# Altium PCB DTM17E0000.PcbDoc
Units mm, origin at the board's own origin, x right, y up, seen from the top; angles counter-clockwise.
Board outline 50.8 x 22.35 mm, 2 copper layers (Top Layer, Bottom Layer); 43 components, 29 nets, 157 pads, 84 vias.
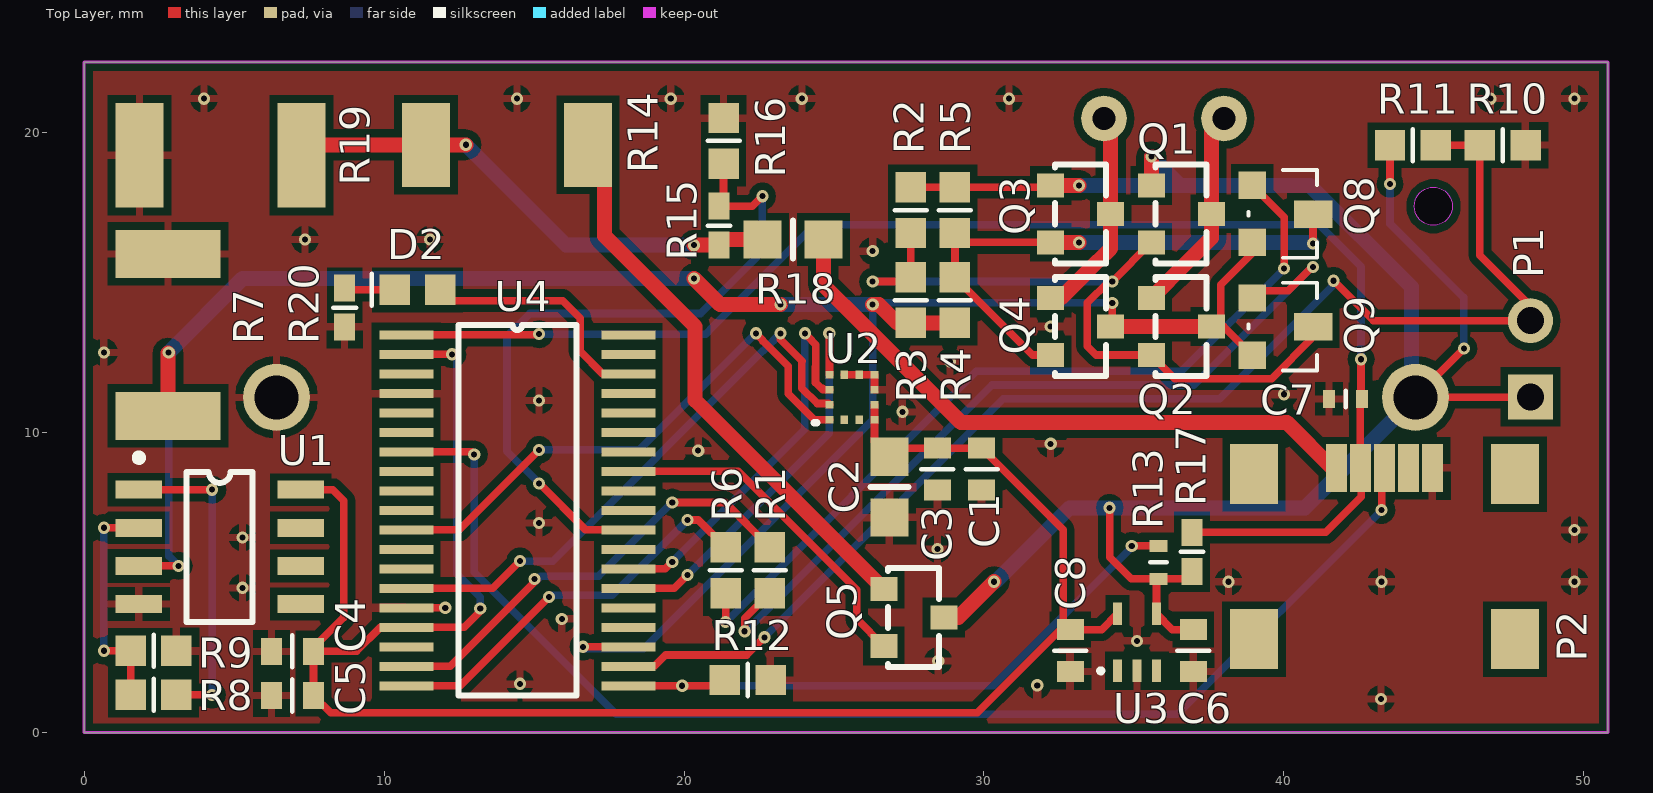
[diagram p0: Top Layer view]
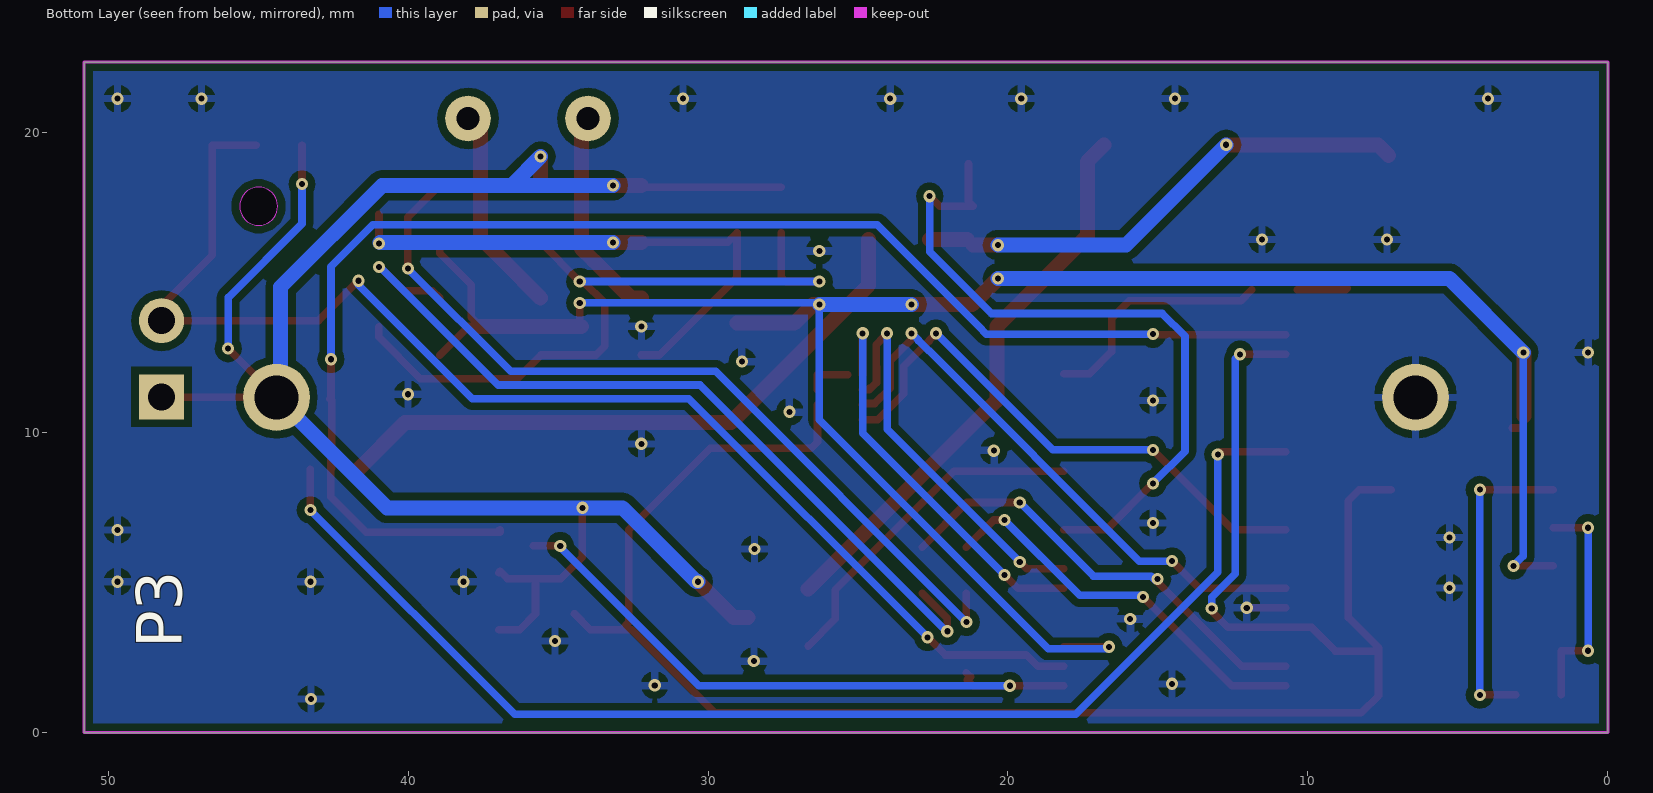
[diagram p1: Bottom Layer view, seen from below]

## Layer stack, top to bottom
Top Solder: solder mask 0.0102, Solder Resist, Dk 3.5
Top Layer: signal copper 0.0356
Dielectric 1: dielectric 0.32, FR-4, Dk 4.8
Bottom Layer: signal copper 0.0356
Bottom Solder: solder mask 0.0102, Solder Resist, Dk 3.5

## Board outline
0,0 50.8,0 50.8,22.352 0,22.352

## Design rules (kind name [scope] priority, off if disabled: settings)
Clearance [All] p1: gap=0.254 except(0.1: SMDPad-SMDPad; 0.2: Track-Track Track-SMDPad)
PolygonConnect [All] p1: connectstyle=Relief reliefconductorwidth=0.254 reliefentries=4 polygonreliefangle="90 Angle" airgapwidth=0.254
RoutingVias [All] p1: holewidth=0.711 width=1.27 viastyle="Through Hole" minholewidth=0.711 minwidth=1.27 maxholewidth=0.711 maxwidth=1.27
SolderMaskExpansion [All] p1: expansion=0.102
Width [All] p1: maxlimit=0.5 minlimit=0.254 preferedwidth=0.254 minimp=50.000000 maximp=50.000000 favimp=50.000000
30 further rules are at their usual default settings.

## Components (designator, comment, footprint, x,y, rotation, side; value= is the part's Value field where it differs from the comment)
C1 "0.1uF" "0603 Small" 29.92,8.781 r90 top (schematic designator C8)
C2 "10uF" "0805 Small" 26.846,8.18 r90 top (schematic designator C?)
C3 "0.1uF" "0603 Small" 28.447,8.781 r270 top (schematic designator C8)
C4 "0.1uF" "0603 Small" 6.946,2.708 r180 top (schematic designator C8)
C5 "0.1uF" "0603 Small" 6.946,1.235 r180 top (schematic designator C8)
C6 "0.1uF" "0603 Small" 36.978,2.732 r270 top (schematic designator C8)
C7 "1nF" "0402 Small" 42.054,11.125 r0 top (schematic designator C?)
C8 "0.1uF" "0603 Small" 32.876,2.732 r90 top
D2 "RED" "0603 LED" 11.114,14.757 r180 top
P1 "Header 2H" "Header 2" 48.218,11.191 r180 top
P2 "Mini USB" "Mini USB" 39,3.114 r90 top
P3 "BH123A" BH123A 6.415,11.176 r0 bottom
Q1 "MOSFET-P" SOT23 36.581,17.292 r270 top (schematic designator Q?)
Q2 "MOSFET-N" SOT23 36.581,13.536 r270 top (schematic designator Q?)
Q3 "MOSFET-P" SOT23 33.223,17.292 r270 top
Q4 "MOSFET-N" SOT23 33.223,13.536 r270 top
Q5 "MOSFET-N" SOT23 27.661,3.835 r270 top
Q8 "MMST2222A" SOT-23N 39.961,17.292 r270 top
Q9 "MMST2222A" SOT-23N 39.961,13.536 r270 top
R1 "1K" "0603 resistor" 22.86,5.41 r90 top (schematic designator R?)
R2 "1M" "0603 resistor" 27.559,17.417 r270 top (schematic designator R?)
R3 "10M" "0603 resistor" 27.559,14.419 r90 top (schematic designator R?)
R4 "10M" "0603 resistor" 29.032,14.419 r90 top (schematic designator R14)
R5 "1M" "0603 resistor" 29.032,17.417 r270 top (schematic designator R16)
R6 "1K" "0603 resistor" 21.387,5.41 r90 top (schematic designator R18)
R7 "0.1" "2512 RESISTOR" 2.796,13.259 r270 top (schematic designator R13)
R8 "100KΩ" "0603 Resistor" 2.316,2.728 r180 top (schematic designator R5)
R9 "1MΩ" "0603 Resistor" 2.316,1.255 r180 top
R10 "1MΩ" "0603 Resistor" 47.295,19.583 r180 top (schematic designator R2)
R11 "1MΩ" "0603 Resistor" 44.297,19.583 r180 top (schematic designator R2)
R12 "1MΩ" "0603 Resistor" 22.123,1.753 r180 top (schematic designator R2)
R13 "2.7M" "0402 Small" 35.821,5.674 r90 top
R14 "2.7Ω" "2010 resistor" 14.097,19.596 r180 top (schematic designator R13)
R15 "330K" "0402 Resistor" 21.165,16.899 r90 top (schematic designator R?)
R16 "1M" "0603 resistor" 21.318,19.726 r90 top
R17 "47K" "0402 Resistor" 36.934,6.024 r90 top (schematic designator R?)
R18 "2.4" "0805 Small" 23.629,16.434 r0 top (schematic designator R13)
R19 "13Ω" "2512 RESISTOR" 4.546,19.246 r0 top (schematic designator R14)
R20 "1KΩ" "0402 Resistor" 8.687,14.165 r90 top
U1 "TS27L2" SOIC-8 4.521,6.192 r0 top
U2 "LIS2HH12" LIS2HH12 26.349,10.426 r180 top
U3 "TPS71533DCKR" SC70_5 34.451,2.057 r90 top
U4 "MSP430F2272IDA" MSP430F2272IDA 10.744,13.259 r0 top (schematic designator U?)

## Footprints (in the part's own frame and the unit in brackets; to place one, negate y for a bottom-side part, rotate by r counter-clockwise, add the part's x,y. Pads: shape width x height; smd on the part's side, far side on the other; paste and mask are expansions set on the pad)
"0402 Resistor" [mm]
  rect 0.9x0.7 smd: 1(-0.65,0) 2(0.65,0)
  silkscreen extent 0,-0.38 0,0.38, body extent -0.52,-0.27 0.53,0.28, height 0.25
"0402 Small" [mm]
  rect 0.4x0.6 smd: 1(-0.55,0) 2(0.55,0)
  silkscreen extent 0,-0.27 0,0.28, body extent -0.52,-0.27 0.53,0.28, height 0.25
"0603 LED" [mil]
  rect 40x40 smd: 1(-30,0) 2(30,0)
  silkscreen extent 60,-21 60,21, body extent -31,-16 32,16, height 37
"0603 resistor" [mil]
  rect 40x40 smd: 1(-30,0) 2(30,0)
  silkscreen extent 0,-21 0,21, body extent -30,-15 31,15, height 20
"0603 Resistor" [mil] "Axial Device, Thru-Hole; 2 Leads; 0.3 in Pin Spacing"
  rect 40x40 smd: 1(-30,0) 2(30,0)
  silkscreen extent 0,-21 0,21, body extent -30,-15 31,15, height 20
"0603 Small" [mm]
  rect 0.7x0.9 smd: 1(-0.7,0) 2(0.7,0)
  silkscreen extent 0,-0.53 0,0.53, body extent -0.77,-0.38 0.77,0.38, height 0.51
"0805 Small" [mil]
  rect 50x50 smd: 1(-40,0) 2(40,0)
  silkscreen extent 0,-25 0,25, body extent -40,-25 40,25, height 25
"2010 resistor" [mm]
  rect 1.6x2.8 smd: 1(-2.7,0) 2(2.7,0)
"2512 RESISTOR" [mm]
  rect 1.6x3.5 smd: 1(-2.7,0) 2(2.7,0)
BH123A [mm] "CR123A Battery Holder"
  round 2.232 hole 1.47: 1(37.97,0) 2(0,0)
  Keep-Out Layer board cut-out: 37.93,-6.37 37.978,-6.613 38.116,-6.819 38.322,-6.957 38.565,-7.005 38.565,-7.005 38.808,-6.957 39.014,-6.819 39.152,-6.613 39.2,-6.37 39.2,-6.37 39.152,-6.127 39.014,-5.921 38.808,-5.783 38.565,-5.735 38.565,-5.735 38.322,-5.783 38.116,-5.921 37.978,-6.127 37.93,-6.37
  body extent -2.64,-9.02 40.61,9.02, height 12.09
"Header 2" [mm] "Header 2"
  rect 1.5x1.5 hole 0.9: 1(0,0)
  round 1.5 hole 0.9: 2(0,-2.54)
LIS2HH12 [mm]
  rect 0.275x0.25 smd: 1(1.5,0) 2(1.5,-0.5) 3(1.5,-1) 4(1.5,-1.5) 7(0,-1.5) 8(0,-1) 9(0,-0.5) 10(0,0)
  rect 0.25x0.275 smd: 5(1,-1.5) 6(0.5,-1.5) 11(0.5,0) 12(1,0)
  silkscreen extent 1.93,0.1 2.01,0.1
"Mini USB" [mm]
  rect 1.6x0.7 smd: 1(5.7,-2.75) 2(5.7,-3.55) 3(5.7,-4.35) 4(5.7,-5.15) 5(5.7,-5.95)
  rect 2x1.6 smd: 6(5.5,-8.7) 7(0,-8.7) 8(0,0) 9(5.5,0)
  body extent -3.13,-8.83 5.63,0.13, height 3.88
MSP430F2272IDA [mm]
  rect 1.8x0.3 smd: 1(0,0) 2(0,-0.65) 3(0,-1.3) 4(0,-1.95) 5(0,-2.6) 6(0,-3.25) 7(0,-3.9) 8(0,-4.55) 9(0,-5.2) 10(0,-5.85) 11(0,-6.5) 12(0,-7.15) 13(0,-7.8) 14(0,-8.45) 15(0,-9.1) 16(0,-9.75) 17(0,-10.4) 18(0,-11.05) 19(0,-11.7) 20(7.4,-11.7) 21(7.4,-11.05) 22(7.4,-10.4) 23(7.4,-9.75) 24(7.4,-9.1) 25(7.4,-8.45) 26(7.4,-7.8) 27(7.4,-7.15) 28(7.4,-6.5) 29(7.4,-5.85) 30(7.4,-5.2) 31(7.4,-4.55) 32(7.4,-3.9) 33(7.4,-3.25) 34(7.4,-2.6) 35(7.4,-1.95) 36(7.4,-1.3) 37(7.4,-0.65) 38(7.4,0)
  silkscreen extent 1.73,-12.03 5.67,0.33
SC70_5 [mm]
  rect 0.75x0.3 smd: 1(0,0) 2(0,-0.65) 3(0,-1.3) 4(1.9,-1.3) 5(1.9,0)
  silkscreen extent -0.08,0.48 0.08,0.63, body extent 0.3,-1.66 1.54,0.34, height 1.07
SOIC-8 [mm]
  rect 1.55x0.6 smd: 1(-2.7,1.905) 2(-2.7,0.635) 3(-2.7,-0.635) 4(-2.7,-1.905) 5(2.7,-1.905) 6(2.7,-0.635) 7(2.7,0.635) 8(2.7,1.905)
  silkscreen extent -2.81,-2.5 1.1,3.09, body extent -1.91,-2.54 1.91,2.54, height 1.52
SOT23 [mm] "TO, Flat Index; 3 In-Line, Axial Leads; Body Dia. 4.6mm; Lead Dia. 0.5 mm (max)"
  rect 0.8x0.9 smd: 1(-0.95,-1) 2(0.95,-1) 3(0,1)
  silkscreen extent -1.65,-0.86 1.65,0.84, body extent -1.45,-1.32 1.45,1.47, height 1.02
SOT-23N [mil]
  rect 36x36 smd: B(-37.5,-40) E(37.5,-40)
  rect 36x50 smd: C(0.5,40)
  silkscreen extent -57,-45 58,45, body extent -57,-52 57,58, height 40

## Part data
C1 C3 C4 C5 C6 C8: library part CAP, "CAP CER 0.1UF 50V 10% X7R 0603"
C2: library part Cap, "CAP CER 10UF 6.3V X5R 0805"
C7: library part Cap, "CAP CER 1000PF 6.3V X5R 0402"
D2: library part LED2, "Standard LEDs - SMD Red 630nm 700mcd"
P1: "Header, 2-Pin, Right Angle"
P2: "CONN MINI USB RCPT RA TYPE B SMD"
P3: "CR123A Battery Holder    Features reverse polarity protection"
Q1 Q3: "MOSFET P-CH 20V 4.2A SOT23"
Q2 Q4 Q5: "MOSFET N-CH 20V 2.3A SOT23"
Q8 Q9: library part NPN1, "TRANSISTOR NPN GP 40V SOT23"
R1 R6: library part Resistor, "RES SMD 1K OHM 5% 1/10W 060"
R2 R5 R16: library part Resistor, "RES SMD 1M OHM 5% 1/10W 0603"
R3 R4: library part Resistor, "RES SMD 10M OHM 5% 1/10W 0603"
R7: library part Resistor, "RES SMD 0.1 OHM 5% 2W 2512"
R8: library part Res1, "RES SMD 100K OHM 5% 1/10W 0603"
R9 R10 R11 R12: library part Res1, "RES SMD 1M OHM 5% 1/10W 0603"
R13: library part Resistor, "RES SMD 2.7M OHM 5% 1/16W 0402"
R14: library part Resistor, "RES SMD 2.7 OHM 5% 3/4W 2010"
R15: library part Resistor, "RES SMD 330K OHM 5% 1/10W 0603"
R17: library part Resistor, "RES SMD 47K OHM 5% 1/16W 0402"
R18: library part Resistor, "RES SMD 2 OHM 5% 0.4W 0805"
R19: library part Resistor, "RES SMD 13 OHM 1% 2W 2512"
R20: library part Resistor, "RES 10K OHM .25W 5% 0603 SMD"
U1: "OP AMP - 2 CHANNEL"
U3: "IC REG LDO 3.3V 50MA SC70-5"
U4: library part CMP-0365-00081-2, "16 MHz Mixed Signal Microcontroller with 32 KB Flash, 1024 B SARM and 32 GPIOs, -40 to 85 degC, 38-pin SOP (DA), Green (RoHS & no Sb/Br)"

## Free pads (board coordinates)
  round 1.524 hole 0.762: 2(34,20.472) 2(38,20.472)

## Via types
v1: diameter 0.406, hole 0.203, Top Layer to Bottom Layer, tented both sides, 84 vias

## Nets (pads, with @x,y where several pads share a name; then routed paths per layer and width w, separated by ;. In a path a pad name is that pad's centre, name@x,y a point inside that pad or via, vN(x,y) a via of type N, cw(c..) or ccw(c..) an arc to the next point about the centre after c; other vN are vias at no path point)
GND: C1.1 C2.1 C3.2 C4.2 C5.2 C6.2 C7.1 C8.1 P2.5 P3.2 R7.1 R8.1 R10.1 R12.1 R16.2 R19.1 R20.1 U1.4 U2.5 U2.6 U2.7 U2.8 U3.2 U4.4 U4.15 | length 2.8
  Top Layer w0.254: U4.15 v1(12.04,4.159) ; U2.5 U2.6 U2.7 U2.8
  other v1: 43.231,1.118 31.775,1.575 14.529,1.626 28.473,2.388 35.103,3.048 15.926,3.785 5.283,4.826 38.152,5.029 43.256,5.029 49.682,5.029 28.447,6.121 5.283,6.502 49.682,6.756 15.17,6.985 20.472,9.398 32.223,9.627 27.28,10.693 15.17,11.074 40.005,11.278 28.863,12.37 0.66,12.675 32.223,13.536 26.289,16.053 7.366,16.434 11.532,16.434 4,21.133 14.427,21.133 19.558,21.133 23.927,21.133 30.836,21.133 46.888,21.133 49.682,21.133
NetC7_2: C7.2 P2.2 R17.2 U4.1 | length 48.5
  Top Layer w0.254: U4.1 15.145,13.259 v1(15.17,13.284) ; R17.2@36.934,6.751 R17.2 R17.2@36.936,6.677 ; R17.2@36.984,6.724 R17.2@36.936,6.677 ; P2.2@42.57,8.834 P2.2 42.55,11.071 C7.2 42.57,11.159 v1(42.57,12.446) ; P2.2@42.579,9.357 42.579,7.857 41.399,6.677 R17.2@36.936,6.677
  Bottom Layer w0.254: v1(15.17,13.284) 20.717,13.284 20.98,13.548 20.98,13.552 24.355,16.926 41.177,16.926 42.57,15.533 v1(42.57,12.446)
NetD2_1: D2.1 U4.36 | length 8.1
  Top Layer w0.254: D2.1 12.232,14.402 15.951,14.402 16.535,13.818 16.535,12.706 17.282,11.959 U4.36
NetD2_2: D2.2 R20.2 | length 1.7
  Top Layer w0.254: R20.2 8.745,14.757 D2.2
NetP1_2: P1.2 R10.2 R11.1 U4.21 | length 44
  Top Layer w0.254: U4.21 19.007,2.209 19.385,2.588 22.095,2.588 v1(22.682,3.175) ; v1(41.656,15.062) 42.987,13.731 P1.2 48.218,14.234 46.533,15.919 R10.2 R11.1
  Bottom Layer w0.254: v1(22.682,3.175) 30.639,11.132 37.852,11.132 41.656,14.935 v1(41.656,15.062)
NetP2_1: P2.1 R18.2 | length 21.1
  Top Layer w0.5: R18.2 24.645,14.918 25.996,13.568 29.23,10.334 40.099,10.334 P2.1@41.656,8.777
NetP2_3: P2.3 U4.7 | length 42.6
  Top Layer w0.254: U4.7 12.916,9.359 v1(13.005,9.271) ; v1(43.256,7.417) P2.3@43.256,8.777
  Bottom Layer w0.254: v1(13.005,9.271) 13.005,5.35 17.745,0.61 36.449,0.61 v1(43.256,7.417)
NetQ1_2: Q1.2 Q2.2 Q9.C R2.2 R3.2 | length 24.1
  Top Layer w0.254: v1(26.289,15.037) 27.415,15.037 R3.2 R2.2 ; Q1.2 v1(34.276,15.037) 34.161,15.037 33.446,14.322 33.446,12.883 33.744,12.586 Q2.2 36.367,11.799 39.586,11.799 40.977,13.19 Q9.C
  Bottom Layer w0.254: v1(26.289,15.037) v1(34.276,15.037)
NetQ1_3: pad.2@38,20.472 Q1.3 Q2.1 | length 7
  Top Layer w0.254: pad.2@37.581,20.053 pad.2@38,20.472
  Top Layer w0.5: Q2.1 36.779,15.684 37.581,16.486 Q1.3 pad.2@37.581,20.053
NetQ2_3: Q2.3 Q4.3 Q8.E Q9.E R3.1 R4.1 R7.2 U1.3 U4.22 | length 74.4
  Top Layer w0.254: U1.3 v1(3.15,5.557) ; v1@2.796,12.651 v1(2.819,12.675) ; R7.2@2.819,10.152 R7.2@3.183,10.152 ; v1@16.637,2.794 16.702,2.859 U4.22 ; Q4.3 34.276,13.588 v1(34.276,14.326) ; Q9.E 37.993,13.536 Q2.3 37.897,13.852 37.897,14.935 38.945,15.984 Q8.E
  Top Layer w0.5: R7.2 v1@2.796,12.651 ; v1(20.336,15.138) 21.2,14.275 v1(23.213,14.275) ; v1(26.289,14.275) 26.492,14.275 27.11,13.657 R3.1 R4.1 ; Q4.3 Q2.3
  Bottom Layer w0.254: v1(2.819,12.675) 2.819,5.887 v1(3.15,5.557) ; v1@16.637,2.794 18.653,2.794 26.289,10.43 v1(26.289,14.275) ; v1@26.238,14.326 v1(34.276,14.326)
  Bottom Layer w0.5: v1(2.819,12.675) 5.283,15.138 v1(20.336,15.138) ; v1(23.213,14.275) v1(26.289,14.275)
  other v1: 16.637,2.859
NetQ3_2: Q3.2 Q4.2 Q8.C R4.2 R5.2 | length 18.8
  Top Layer w0.254: Q4.2 31.628,12.586 R4.2 R5.2 29.345,16.342 Q3.2 ; v1(40.97,16.307) 40.97,17.272 Q8.C
  Top Layer w0.5: Q3.2 v1(33.172,16.342)
  Bottom Layer w0.254: v1@40.935,16.342 v1(40.97,16.307)
  Bottom Layer w0.5: v1(33.172,16.342) v1@40.935,16.342
NetQ3_3: pad.2@34,20.472 Q3.3 Q4.1 | length 7.1
  Top Layer w0.254: pad.2@34,20.472 pad.2@34.223,20.249
  Top Layer w0.5: Q4.1 32.57,14.486 33.405,15.32 33.405,15.33 33.819,15.744 33.829,15.744 34.223,16.138 Q3.3 pad.2@34.223,20.249
NetQ5_1: Q5.1 R14.1 | length 18.9
  Top Layer w0.5: R14.1 17.348,19.045 17.348,16.561 20.371,13.538 20.371,11.076 Q5.1
NetQ5_2: Q5.2 U4.31 | length 11.5
  Top Layer w0.254: U4.31 21.801,8.709 25.756,4.755 25.756,3.791 Q5.2
NetQ8_B: Q8.B R6.1 | length 27.7
  Top Layer w0.254: v1(21.387,3.683) R6.1 ; Q8.B 40.005,17.185 v1(40.005,15.469)
  Bottom Layer w0.254: v1(21.387,3.683) 29.743,12.04 36.576,12.04 v1(40.005,15.469)
NetQ9_B: Q9.B R1.1 | length 28
  Top Layer w0.254: v1(22.022,3.378) 22.022,3.805 22.86,4.643 R1.1 ; Q9.B 39.189,14.732 40.144,14.732 40.931,15.519 v1(40.97,15.519)
  Bottom Layer w0.254: v1@22.059,3.378 30.267,11.586 36.998,11.586 40.931,15.519 v1(40.97,15.519)
NetR1_2: R1.2 U4.18 | length 14.9
  Top Layer w0.254: U4.18 12.201,2.209 15.071,5.08 v1@15.088,5.08 ; v1@19.73,7.671 21.367,7.671 22.86,6.177 R1.2
  Bottom Layer w0.254: v1@15.088,5.08 15.218,5.21 17.148,5.21 v1(19.609,7.671)
  other v1: 15.014,5.118
NetR6_2: R6.2 U4.19 | length 13.3
  Top Layer w0.254: U4.19 12.538,1.559 v1(15.5,4.521) ; v1(20.117,7.087) 20.472,7.087 R6.2
  Bottom Layer w0.254: v1(15.5,4.521) 15.551,4.572 17.602,4.572 v1(20.117,7.087)
NetR8_2: R8.2 R9.2 U1.2 | length 7.6
  Top Layer w0.254: v1(0.66,2.728) R8.2 R9.2 ; v1(0.66,6.827) U1.2
  Bottom Layer w0.254: v1(0.66,2.728) v1(0.66,6.827)
NetR9_1: R9.1 U1.1 | length 10.5
  Top Layer w0.254: U1.1 v1(4.267,8.097) ; R9.1 v1(4.267,1.255)
  Bottom Layer w0.254: v1(4.267,1.255) v1(4.267,8.097)
NetR12_2: R12.2 R13.2 U4.20 | length 21.3
  Top Layer w0.254: U4.20 v1(19.939,1.559) 21.168,1.559 R12.2 ; R12.2@21.25,1.864 R12.2@21.387,2 ; v1(34.925,6.224) R13.2
  Bottom Layer w0.254: v1(19.939,1.559) 30.312,1.559 34.925,6.172 v1(34.925,6.224)
NetR14_2: R14.2 R15.1 R18.1 R19.2 | length 16.9
  Top Layer w0.254: R15.1 R15.1@21.35,16.434
  Top Layer w0.5: R19.2@7.315,19.246 7.665,19.596 R14.2 v1(12.725,19.596) ; v1(20.336,16.249) R15.1 ; R15.1@21.35,16.434 R18.1
  Bottom Layer w0.5: v1(12.725,19.596) 16.073,16.249 v1(20.336,16.249)
NetR15_2: R15.2 R16.1 U4.28 | length 23.6
  Top Layer w0.254: v1(15.17,8.305) 16.716,6.759 U4.28 ; R16.1 21.318,17.701 R15.2 22.28,17.549 v1(22.613,17.882)
  Bottom Layer w0.254: v1(15.17,8.305) 14.097,9.378 14.097,13.208 14.859,13.97 20.549,13.97 22.613,16.035 v1(22.613,17.882)
NetU2_1: U2.1 U4.11 | length 18.6
  Top Layer w0.254: U4.11 12.506,6.759 v1(15.17,9.423) ; v1(22.398,13.31) 22.629,13.078 22.629,13.055 23.476,12.207 23.476,11.289 24.34,10.426 U2.1
  Bottom Layer w0.254: v1(15.17,9.423) 18.512,9.423 v1(22.398,13.31)
NetU2_2: U2.2 U4.14 | length 19.3
  Top Layer w0.254: U4.14 13.623,4.809 v1(14.529,5.715) ; v1(23.213,13.31) 23.213,13.113 23.941,12.385 23.93,12.374 23.93,11.478 24.436,10.972 24.803,10.972 U2.2
  Bottom Layer w0.254: v1(14.529,5.715) 15.618,5.715 22.629,12.725 22.64,12.725 22.982,13.068 22.982,13.078 v1(23.213,13.31)
NetU2_3: U2.3 U4.26 | length 13.4
  Top Layer w0.254: U4.26 19.379,5.459 v1(19.609,5.69) ; v1(24.028,13.31) 24.26,13.078 24.26,13.068 24.395,12.932 24.395,12.197 24.384,12.186 24.384,11.666 24.576,11.474 24.624,11.474 24.624,11.426 U2.3
  Bottom Layer w0.254: v1(19.609,5.69) 24.028,10.109 v1(24.028,13.31)
NetU2_4: U2.4 U4.25 | length 13.6
  Top Layer w0.254: U4.25 19.668,4.809 v1(20.117,5.258) ; v1(24.844,13.31) 24.849,13.304 U2.4
  Bottom Layer w0.254: v1(20.117,5.258) 24.844,9.985 v1(24.844,13.31)
VBAT: C6.1 P1.1 P3.1 Q1.1 Q3.1 Q5.3 R2.1 R5.1 R11.2 R13.1 R17.1 U3.4 | length 64.6
  Top Layer w0.254: R2.1 R5.1 32.16,18.179 Q3.1 ; v1(34.188,7.493) 34.188,5.842 34.906,5.124 R13.1 ; C6.1 36.276,3.432 U3.4 35.751,5.055 R13.1 ; R17.1@36.978,5.33 R17.1 36.684,5.124 R13.1 ; v1(43.535,18.288) R11.2 ; v1(45.999,12.802) 44.385,11.187 P3.1 47.7,11.176 P1.1@48.218,11.694
  Top Layer w0.5: Q5.3 29.143,3.835 v1(30.337,5.029) ; Q3.1 v1(33.172,18.242) ; Q1.1 v1(35.581,19.202)
  Bottom Layer w0.254: v1(43.535,18.288) 43.535,16.967 45.999,14.503 v1(45.999,12.802) ; P3.1@44.247,11.314 P3.1
  Bottom Layer w0.5: v1(30.337,5.029) 30.388,5.029 32.852,7.493 v1(34.188,7.493) 40.702,7.493 P3.1 ; v1(33.172,18.242) 36.541,18.242 ; v1(35.581,19.202) 36.541,18.242 ; P3.1@44.247,11.314 44.247,14.859 40.864,18.242 36.541,18.242
VCC: C1.2 C2.2 C3.1 C4.1 C5.1 C8.2 U1.8 U2.9 U2.10 U3.5 U4.2 U4.16 | length 65.7
  Top Layer w0.254: U1.8 8.286,8.097 8.661,7.722 8.661,3.837 7.646,2.822 C4.1 ; U4.2 v1(12.268,12.609) ; v1(13.208,4.14) 13.208,4.039 12.679,3.509 U4.16 9.882,3.509 9.081,2.708 C4.1 ; U2.9 U2.10 26.349,9.694 26.561,9.481 C3.1 C1.2 32.639,6.762 32.639,3.669 C8.2 ; U3.5 33.926,3.432 C8.2 ; C4.1 C5.1 8.221,0.66 29.769,0.66 32.541,3.432 C8.2
  Bottom Layer w0.254: v1(12.268,12.609) 12.421,12.457 12.421,5.292 13.208,4.505 v1(13.208,4.14)
pads on no net: P2.4 P2.6 P2.7 P2.8 P2.9 U1.5 U1.6 U1.7 U2.11 U2.12 U3.1 U3.3 U4.3 U4.5 U4.6 U4.8 U4.9 U4.10 U4.12 U4.13 U4.17 U4.23 U4.24 U4.27 U4.29 U4.30 U4.32 U4.33 U4.34 U4.35 U4.37 U4.38

## Polygon pours and split planes (outlines as drawn)
GND on Bottom Layer "Top Layer-No Net" (solid, pour order 8): 0,22.352 0,0 50.8,0 50.8,22.352
GND on Top Layer "Top Layer-No Net" (solid, pour order 2): 0,22.352 0,0 50.8,0 50.8,22.352 19.558,22.352

## Keep-outs
Keep-Out Layer:
  the board outline again, w0.1